# Altium PCB digital_placeholder.PcbDoc
Units mm, origin at the board's own origin, x right, y up, seen from the top; angles counter-clockwise.
Board outline 32.7 x 157.2 mm, 2 copper layers (Top Layer, Bottom Layer); 11 components, 204 nets, 172 pads, 32 vias.
Unrouted connection lines stored in the file: 26.
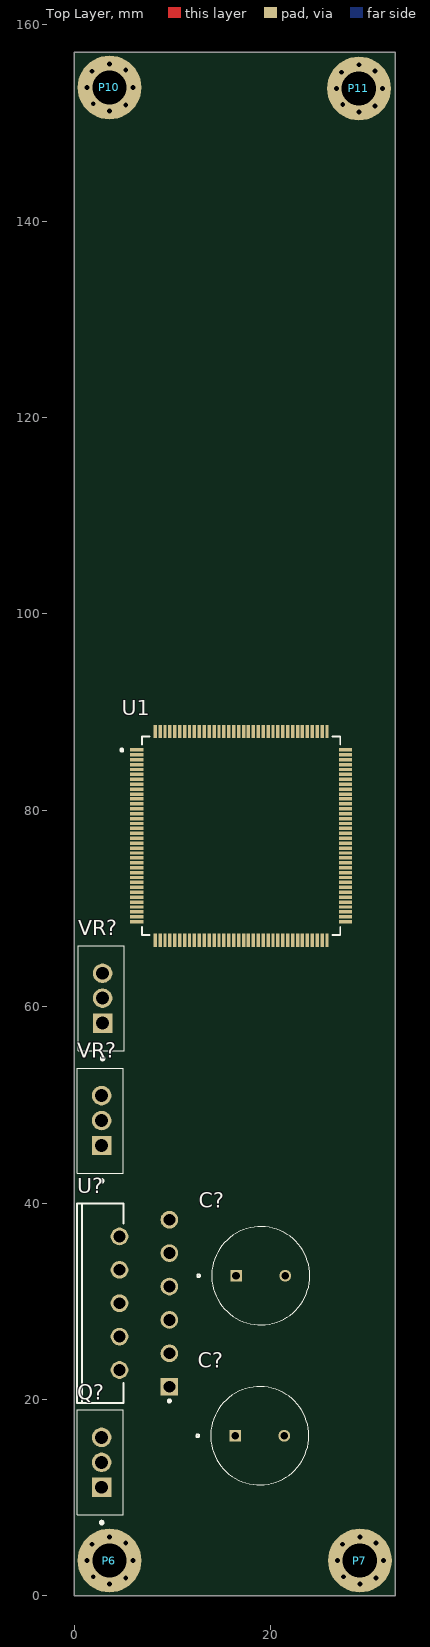
[diagram p0: Top Layer view]
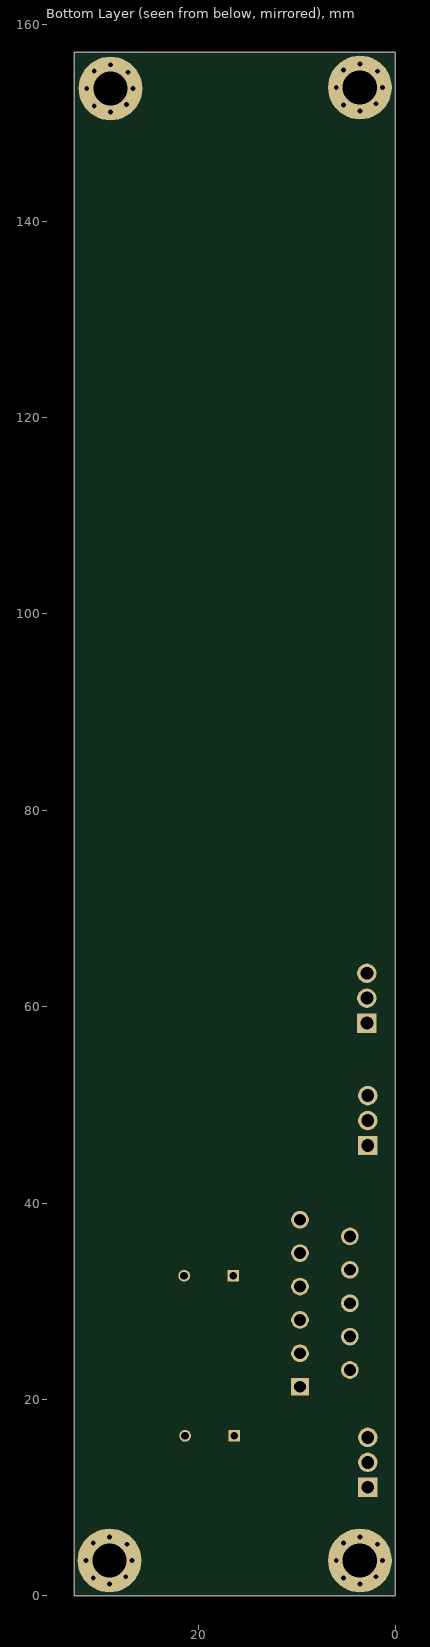
[diagram p1: Bottom Layer view, seen from below]

## Layer stack, top to bottom
Top Solder: solder mask 0.0102, Solder Resist, Dk 3.5
Top Layer: signal copper 0.0356
Dielectric 1: dielectric 0.32, FR-4, Dk 4.8
Bottom Layer: signal copper 0.0356
Bottom Solder: solder mask 0.0102, Solder Resist, Dk 3.5

## Board outline
0,0 32.7,0 32.7,157.2 0,157.2

## Design rules (kind name [scope] priority, off if disabled: settings)
Clearance [All] p1: gap=0.254 ignorepadtopadclearanceinfootprint=FALSE except(0: Arc-Hole Track-Hole SMDPad-Hole THPad-Hole Via-Hole Fill-Hole Poly-Hole Region-Hole Text-Hole)
PolygonConnect [All] p1: connectstyle=Relief reliefconductorwidth=0.254 reliefentries=4 polygonreliefangle="90 Angle" airgapwidth=0.254
RoutingVias [All] p1: holewidth=0.711 width=1.27 viastyle="Through Hole" minholewidth=0.711 minwidth=1.27 maxholewidth=0.711 maxwidth=1.27
SolderMaskExpansion [All] p1: expansion=0.102 istentingtop=FALSE
Width [All] p1: maxlimit=0.254 minlimit=0.254 preferedwidth=0.254
30 further rules are at their usual default settings.

## Classes and differential pairs
channel class voltagesource: OPA5481 OPA5482
channel class mixer: MIXER1 MIXER2
channel class low_pass: LO1_LPF LO2_LPF LP1 LP2 LP3 LP4
channel class LO: LO1 LO2
channel class ina: INA LO1_INA1 LO1_INA2 LO2_INA1 LO2_INA2
channel class high_pass: HP HP2
channel class dcshift: DC1 dcshift1 dcshift2
component class OPA5482: *_OPA5482
component class OPA5481: *_OPA5481
component class MECH: P4 P5 P6 P7 P8 P9 P10 P11
component class MCU: U1
component class 24V_Splitter: Q?
component class 5v_Regulator: VR?
component class -5v_Regulator: VR?

## Components (designator, comment, footprint, x,y, rotation, side; value= is the part's Value field where it differs from the comment)
C? "1000uF" UVR1V102MHD1TO 19,32.6 r0 top
C? "1000uF" UVR1V102MHD1TO 18.9,16.3 r0 top
P6 "M3 Mounting Hole" MH-M3 3.6,3.6 r0 top
P7 "M3 Mounting Hole" MH-M3 29.1,3.6 r0 top
P10 "M3 Mounting Hole" MH-M3 3.6,153.6 r0 top
P11 "M3 Mounting Hole" MH-M3 29,153.5 r0 top
Q? "NPN" TO-220-3 2.8,11.06 r90 top
U1 "STM32F767ZIT6" FP-LQFP144-1A-MFG 17,77.4 r0 top
U? "OPA549T" KV0011A 7.16,29.81 r180 top
VR? "Volt Reg" TO-220-3 2.8,45.86 r90 top
VR? "Volt Reg" TO-220-3 2.9,58.32 r90 top

## Footprints (in the part's own frame and the unit in brackets; to place one, negate y for a bottom-side part, rotate by r counter-clockwise, add the part's x,y. Pads: shape width x height; smd on the part's side, far side on the other; paste and mask are expansions set on the pad)
FP-LQFP144-1A-MFG [mm]
  rect 1.35x0.35 smd paste+0 mask+0: 1(-10.625,8.75) 2(-10.625,8.25) 3(-10.625,7.75) 4(-10.625,7.25) 5(-10.625,6.75) 6(-10.625,6.25) 7(-10.625,5.75) 8(-10.625,5.25) 9(-10.625,4.75) 10(-10.625,4.25) 11(-10.625,3.75) 12(-10.625,3.25) 13(-10.625,2.75) 14(-10.625,2.25) 15(-10.625,1.75) 16(-10.625,1.25) 17(-10.625,0.75) 18(-10.625,0.25) 19(-10.625,-0.25) 20(-10.625,-0.75) 21(-10.625,-1.25) 22(-10.625,-1.75) 23(-10.625,-2.25) 24(-10.625,-2.75) 25(-10.625,-3.25) 26(-10.625,-3.75) 27(-10.625,-4.25) 28(-10.625,-4.75) 29(-10.625,-5.25) 30(-10.625,-5.75) 31(-10.625,-6.25) 32(-10.625,-6.75) 33(-10.625,-7.25) 34(-10.625,-7.75) 35(-10.625,-8.25) 36(-10.625,-8.75) 73(10.625,-8.75) 74(10.625,-8.25) 75(10.625,-7.75) 76(10.625,-7.25) 77(10.625,-6.75) 78(10.625,-6.25) 79(10.625,-5.75) 80(10.625,-5.25) 81(10.625,-4.75) 82(10.625,-4.25) 83(10.625,-3.75) 84(10.625,-3.25) 85(10.625,-2.75) 86(10.625,-2.25) 87(10.625,-1.75) 88(10.625,-1.25) 89(10.625,-0.75) 90(10.625,-0.25) 91(10.625,0.25) 92(10.625,0.75) 93(10.625,1.25) 94(10.625,1.75) 95(10.625,2.25) 96(10.625,2.75) 97(10.625,3.25) 98(10.625,3.75) 99(10.625,4.25) 100(10.625,4.75) 101(10.625,5.25) 102(10.625,5.75) 103(10.625,6.25) 104(10.625,6.75) 105(10.625,7.25) 106(10.625,7.75) 107(10.625,8.25) 108(10.625,8.75)
  rect 0.35x1.35 smd paste+0 mask+0: 37(-8.75,-10.625) 38(-8.25,-10.625) 39(-7.75,-10.625) 40(-7.25,-10.625) 41(-6.75,-10.625) 42(-6.25,-10.625) 43(-5.75,-10.625) 44(-5.25,-10.625) 45(-4.75,-10.625) 46(-4.25,-10.625) 47(-3.75,-10.625) 48(-3.25,-10.625) 49(-2.75,-10.625) 50(-2.25,-10.625) 51(-1.75,-10.625) 52(-1.25,-10.625) 53(-0.75,-10.625) 54(-0.25,-10.625) 55(0.25,-10.625) 56(0.75,-10.625) 57(1.25,-10.625) 58(1.75,-10.625) 59(2.25,-10.625) 60(2.75,-10.625) 61(3.25,-10.625) 62(3.75,-10.625) 63(4.25,-10.625) 64(4.75,-10.625) 65(5.25,-10.625) 66(5.75,-10.625) 67(6.25,-10.625) 68(6.75,-10.625) 69(7.25,-10.625) 70(7.75,-10.625) 71(8.25,-10.625) 72(8.75,-10.625) 109(8.75,10.625) 110(8.25,10.625) 111(7.75,10.625) 112(7.25,10.625) 113(6.75,10.625) 114(6.25,10.625) 115(5.75,10.625) 116(5.25,10.625) 117(4.75,10.625) 118(4.25,10.625) 119(3.75,10.625) 120(3.25,10.625) 121(2.75,10.625) 122(2.25,10.625) 123(1.75,10.625) 124(1.25,10.625) 125(0.75,10.625) 126(0.25,10.625) 127(-0.25,10.625) 128(-0.75,10.625) 129(-1.25,10.625) 130(-1.75,10.625) 131(-2.25,10.625) 132(-2.75,10.625) 133(-3.25,10.625) 134(-3.75,10.625) 135(-4.25,10.625) 136(-4.75,10.625) 137(-5.25,10.625) 138(-5.75,10.625) 139(-6.25,10.625) 140(-6.75,10.625) 141(-7.25,10.625) 142(-7.75,10.625) 143(-8.25,10.625) 144(-8.75,10.625)
  silkscreen extent -12.27,-10.1 10.1,10.1, body extent -11.4,-11.4 11.4,11.4, height 0.25
KV0011A [mm] "FM, 11-Leads, Body 20.015x4.495mm, Pitch 1.7mm"
  rect 1.8x1.8 hole 1.2: 1(-2.54,8.51)
  round 1.8 hole 1.2: 2(2.54,6.81) 3(-2.54,5.11) 4(2.54,3.41) 5(-2.54,1.71) 6(2.54,0.01) 7(-2.54,-1.69) 8(2.54,-3.39) 9(-2.54,-5.09) 10(2.54,-6.79) 11(-2.54,-8.49)
  silkscreen extent -2.67,-10.15 6.86,10.15, body extent -2.79,-10.15 6.83,10.15, height 20.82
MH-M3 [mm]
  round 6.5 hole 3.5: 1(0,0)
TO-220-3 [mm]
  rect 1.98x1.98 hole 1.32: 1(0,0)
  round 1.98 hole 1.32: 2(2.54,0) 3(5.08,0)
  silkscreen extent -3.74,-2.22 7.88,2.48, body extent -2.44,-1.78 7.52,2.67, height 19.81
UVR1V102MHD1TO [mm]
  rect 1.2x1.2 hole 0.8: 1(-2.5,0)
  round 1.2 hole 0.8: 2(2.5,0)
  silkscreen extent -6.46,-5 5,5, body extent -6.25,-6.35 6.25,6.15, height 22

## Part data
C? C?: library part UVR1V102MHD1TO, "Capacitor, 100uF NICHICON", MFGPN=UVR1V102MHD1TO
P6 P7 P10 P11: library part MH-M3
Q?: "NPN Bipolar Transistor", Code_JEDEC=TO-226-AA, LatestRevisionDate=17-Jul-2002, LatestRevisionNote="Re-released for DXP Platform.", PackageDescription="TO, Flat Index; 3 In-Line, Axial Leads; Body Dia. 4.8mm; Leads 0.55 x 0.51 mm (max)", PackageReference=TO-226-AA, Published=8-Jun-2000, Publisher="Altium Limited"
U1: library part CMP-12105-000074-1, "IC MCU 32BIT 2MB FLASH 144LQFP", Ambient Temperature Range High=+85°C, Ambient Temperature Range Low=-40°C, Frequency=216MHz, Manufacturer=STMicroelectronics, Max Junction Temp=+105°C, Max Supply Voltage=3.6V, Min Supply Voltage=1.7V, Package=LQFP144-1A, Temperature="-40°C to +85°C", Automotive=No, Category=IC, ComponentLink2Description=Datasheet, ComponentLink2URL=https://www.st.com/resource/en/datasheet/stm32f767zi.pdf, Core Architecture="ARM Cortex-M7", Data Bus Width=32bits, Device Class L1="Integrated Circuits (ICs)", Device Class L2="Embedded Processors and Controllers", Device Class L3=Microcontrollers, Digikey Description="IC MCU 32BIT 2MB FLASH 144LQFP", Height=1.6mm, Interface=I2C,SPI,UART,USART,EBI/EMI,CAN,USB,LIN,IrDA,Ethernet,I2S, Ipc Land Pattern Name=QFP50P2200X2200X160-144, Lead Free=Yes, Manufacturer Part Number=STM32F767ZIT6, Memory Size=2048KBytes, Memory Type=FLASH, Mouser Description="ARM Microcontrollers - MCU High-performance and DSP with FPU, ARM Cortex-M7 MCU with 2 Mbytes Flash, 216 MHz CPU, Art Accelerator, L1 cache, SDRAM,", Number Of A/D Converters=3, Number Of Adc Channels=24, Number Of Cores=1, Number Of Ethernet Channels=1, Number Of I2C Channels=4, Number Of I/Os=114, Number Of Pwm Channels=4, Number Of Spi Channels=6, Number Of Timers/Counters=15, Number Of Uart Channels=4, Number Of Usb Channels=1, Octopart=https://octopart.com/stm32f767zit6-stmicroelectronics-70527068, Ram Size=512KBytes, RoHS=TRUE, Standoff Height=0.05mm, Temperature Range High=+85°C, Temperature Range Low=-40°C
U?: library part CMP-0272-03689-4, "High-Voltage, High-Current Operational Amplifier, Excellent Output Swing, 8 to 60 V, -40 to 125 degC, 11-pin FM (KV), Green (RoHS & no Sb/Br)", Manufacturer="Texas Instruments", Rating=Military, Total Supply Voltage(Max)(+5V is 5, +/-5V is 10)=60, Total Supply Voltage(Min)(+5V is 5, +/-5V is 10)=8, CMRR(Min)(dB)=80, Code_JEDEC=MO-48-AA, ComponentLink1Description="Manufacturer URL", ComponentLink1URL=http://www.ti.com/, ComponentLink2Description=Datasheet, ComponentLink2URL=http://www.ti.com/lit/ds/symlink/opa549.pdf, ComponentLink3Description="Package Specification", ComponentLink3URL=http://www.ti.com/litv/pdf/mpzf003b, DatasheetVersion=SBOS093E, Eco-Plan="Green (RoHS & no Sb/Br)", GBW(Typ)(MHz)=0.9, IIB(Max)(pA)=500000, Iq per channel(Max)(mA)=35, Mounting Technology="Through Hole", Number of Channels=1, Offset Drift(Typ)(uV/C)=20, PackageDescription="11-Pin Plastic Flange Mount, Body 20.015 x 4.495 mm, Pitch 1.7 mm", PackageReference=KV0011A, PackageVersion="4202503/C, 06/2009", Packing=TUBE, PartNumber=OPA549T, Slew Rate(Typ)(V/us)=9, Sub Family="High Output Current Amplifier (>=50mA), High Supply Voltage Amplifier (>=30V), Precision Amplifier", Vio (25C)(Max)(mV)=5
VR? VR?: "Voltage Regulator", LatestRevisionDate=29-May-2009, LatestRevisionNote="IPC-7351 Footprint Added.", PackageDescription="3-Pin Transistor Outline Package 2.54 mm Pitch, 15.1 mm Lead Span", PackageReference=D2PAK, Published=24-Mar-1999, Publisher="Altium Limited"

## Via types
v1: diameter 0.5, hole 0.5, Top Layer to Bottom Layer, 32 vias

## Nets (pads, with @x,y where several pads share a name; then routed paths per layer and width w, separated by ;. In a path a pad name is that pad's centre, name@x,y a point inside that pad or via, vN(x,y) a via of type N, cw(c..) or ccw(c..) an arc to the next point about the centre after c; other vN are vias at no path point)
3v3: 
3v3_2: 
24V: 
-24V: 
ADC_CONV: U1.43
ADC_SCK: U1.41
ADC_SDO: U1.42
AGND: 
AVDD: 
B\U\S\Y\: U1.40
C\S\_A: 
C\S\_B: 
C\S\_LO1: 
C\S\_LO2: 
CLK_MODE_SEL_LO1: 
CLK_MODE_SEL_LO2: 
DGND: 
DVDD: 
GND: U1.16 U1.31 U1.38 U1.51 U1.61 U1.83 U1.94 U1.107 U1.120 U1.130
GND_2: 
IO_UPDATE_A: 
IO_UPDATE_B: 
IO_UPDATE_LO1: 
IO_UPDATE_LO2: 
NetC13_2: U1.71
NetC14_2: U1.106
NetC28_HP2_1: 
NetC28_HP2_2: 
NetC28_HP_1: 
NetC28_HP_2: 
NetC29_HP2_2: 
NetC29_HP_2: 
NetC38_LO1_LPF_1: 
NetC38_LO1_LPF_2: 
NetC38_LO2_LPF_1: 
NetC38_LO2_LPF_2: 
NetC38_LP1_1: 
NetC38_LP1_2: 
NetC38_LP2_1: 
NetC38_LP2_2: 
NetC38_LP3_1: 
NetC38_LP3_2: 
NetC38_LP4_1: 
NetC38_LP4_2: 
NetC39_LO1_LPF_1: 
NetC39_LO1_LPF_2: 
NetC39_LO2_LPF_1: 
NetC39_LO2_LPF_2: 
NetC39_LP1_1: 
NetC39_LP1_2: 
NetC39_LP2_1: 
NetC39_LP2_2: 
NetC39_LP3_1: 
NetC39_LP3_2: 
NetC39_LP4_1: 
NetC39_LP4_2: 
NetC40_LO1_LPF_2: 
NetC40_LO2_LPF_2: 
NetC40_LP1_2: 
NetC40_LP2_2: 
NetC40_LP3_2: 
NetC40_LP4_2: 
NetC41_LO1_LPF_2: 
NetC41_LO2_LPF_2: 
NetC41_LP1_2: 
NetC41_LP2_2: 
NetC41_LP3_2: 
NetC41_LP4_2: 
NetC48_2: 
NetC?_1: VR?.3@2.8,50.94
NetC?_2: 
NetC?_LO1_1: 
NetC?_LO2_1: 
NetD2_1: 
NetD3_OPA5481_2: 
NetD3_OPA5482_2: 
NetJ2_1: 
NetJ3_1: 
NetJ?_1: 
NetJ?_01: 
NetJ?_2: 
NetJ?_02: 
NetJ?_3: 
NetJ?_03: 
NetJ?_04: 
NetJ?_22: 
NetJ?_23: 
NetJ?_24: 
NetJ?_25: 
NetL?_1: 
NetP?_1: 
NetP?_2: 
NetQ1_OPA5481_1: 
NetQ1_OPA5481_2: 
NetQ1_OPA5482_1: 
NetQ1_OPA5482_2: 
NetQ?_1: Q?.1
NetR5_1: U1.34
NetR6_2: U1.138
NetR7_INA_1: 
NetR7_INA_2: 
NetR7_LO1_INA1_1: 
NetR7_LO1_INA1_2: 
NetR7_LO1_INA2_1: 
NetR7_LO1_INA2_2: 
NetR7_LO2_INA1_1: 
NetR7_LO2_INA1_2: 
NetR7_LO2_INA2_1: 
NetR7_LO2_INA2_2: 
NetR8_1: 
NetR8_2: 
NetR10_HP2_2: 
NetR10_HP_2: 
NetR14_LO1_LPF_1: 
NetR14_LO2_LPF_1: 
NetR14_LP2_1: 
NetR14_LP3_1: 
NetR20_DC1_1: 
NetR20_dcshift1_1: 
NetR20_dcshift2_1: 
NetR21_DC1_1: 
NetR22_DC1_3: 
NetR22_dcshift1_3: 
NetR22_dcshift2_3: 
NetR24_OPA5481_1: 
NetR24_OPA5482_1: 
NetR25_OPA5481_1: 
NetR25_OPA5481_2: 
NetR25_OPA5482_1: 
NetR25_OPA5482_2: 
NetR40_1: 
NetR?_1: U?.4
NetR?_2: 
NetR?_LO1_1: 
NetR?_LO1_2: 
NetR?_LO2_1: 
NetR?_LO2_2: 
NetS2_MIXER1_2: 
NetS2_MIXER1_5: 
NetS2_MIXER2_2: 
NetS2_MIXER2_5: 
NetU14_MIXER1_15: 
NetU14_MIXER2_15: 
NetU?_1: U?.1 U?.2 U?.3
NetU?_A7: 
NRST: U1.25
P0_A: 
P0_B: 
P0_LO1: 
P0_LO2: 
P1_A: 
P1_B: 
P1_LO1: 
P1_LO2: 
P2_A: 
P2_B: 
P2_LO1: 
P2_LO2: 
P3_A: 
P3_B: 
P3_LO1: 
P3_LO2: 
RADIO_NRST: 
RADIO_RX: 
RADIO_SWCLK: 
RADIO_SWDIO: 
RADIO_TX: 
RESET_A: 
RESET_B: 
RESET_LO1: 
RESET_LO2: 
SCLK: 
SCLK_LO1: 
SDIO_0: 
SDIO_0_LO1: 
SDIO_1_A: 
SDIO_1_B: 
SDIO_1_LO1: 
SDIO_1_LO2: 
SDIO_2: 
SDIO_2_LO1: 
SDIO_3_A: 
SDIO_3_B: 
SDIO_3_LO1: 
SDIO_3_LO2: 
SGND: 
SWCLK: U1.109
SWDIO: U1.105
SWO: 
USART1_RX: 
USART1_TX: 
USBDM: U1.103
USBDP: U1.104
VA+: 
VA-: 
VADC: 
VBUS: U1.101
VD: U1.6 U1.17 U1.30 U1.32 U1.33 U1.39 U1.52 U1.62 U1.72 U1.84 U1.95 U1.108 U1.121 U1.131 U1.143 U1.144
VIN: 
VREF: 
XTAL+_LO1: 
XTAL+_LO2: 
XTAL-_LO1: 
XTAL-_LO2: 
pads on no net: C?.1 C?.2 P6.1 P7.1 P10.1 P11.1 Q?.2 Q?.3 U1.1 U1.2 U1.3 U1.4 U1.5 U1.7 U1.8 U1.9 U1.10 U1.11 U1.12 U1.13 U1.14 U1.15 U1.18 U1.19 U1.20 U1.21 U1.22 U1.23 U1.24 U1.26 U1.27 U1.28 U1.29 U1.35 U1.36 U1.37 U1.44 U1.45 U1.46 U1.47 U1.48 U1.49 U1.50 U1.53 U1.54 U1.55 U1.56 U1.57 U1.58 U1.59 U1.60 U1.63 U1.64 U1.65 U1.66 U1.67 U1.68 U1.69 U1.70 U1.73 U1.74 U1.75 U1.76 U1.77 U1.78 U1.79 U1.80 U1.81 U1.82 U1.85 U1.86 U1.87 U1.88 U1.89 U1.90 U1.91 U1.92 U1.93 U1.96 U1.97 U1.98 U1.99 U1.100 U1.102 U1.110 U1.111 U1.112 U1.113 U1.114 U1.115 U1.116 U1.117 U1.118 U1.119 U1.122 U1.123 U1.124 U1.125 U1.126 U1.127 U1.128 U1.129 U1.132 U1.133 U1.134 U1.135 U1.136 U1.137 U1.139 U1.140 U1.141 U1.142 U?.5 U?.6 U?.7 U?.8 U?.9 U?.10 U?.11 VR?.1 VR?.2 VR?.3@2.9,63.4
copper on no net:
  other v1: 3.6,1.187 29.1,1.187 5.251,1.822 30.751,1.822 1.949,1.949 27.449,1.949 1.314,3.6 6.013,3.6 26.814,3.6 31.513,3.6 1.822,5.251 27.322,5.251 5.251,5.378 30.751,5.378 3.6,6.013 29.1,6.013 29,151.087 3.6,151.187 30.651,151.722 5.251,151.822 27.349,151.849 1.949,151.949 26.714,153.5 31.413,153.5 1.314,153.6 6.013,153.6 27.222,155.151 1.822,155.251 30.651,155.278 5.251,155.378 29,155.913 3.6,156.013